# Altium PCB LED.PcbDoc
Units mil, origin at the board's own origin, x right, y up, seen from the top; angles counter-clockwise.
Board outline 4840 x 1895 mil, 2 copper layers (Top Layer, Bottom Layer); 15 components, 15 nets, 36 pads, 0 vias.
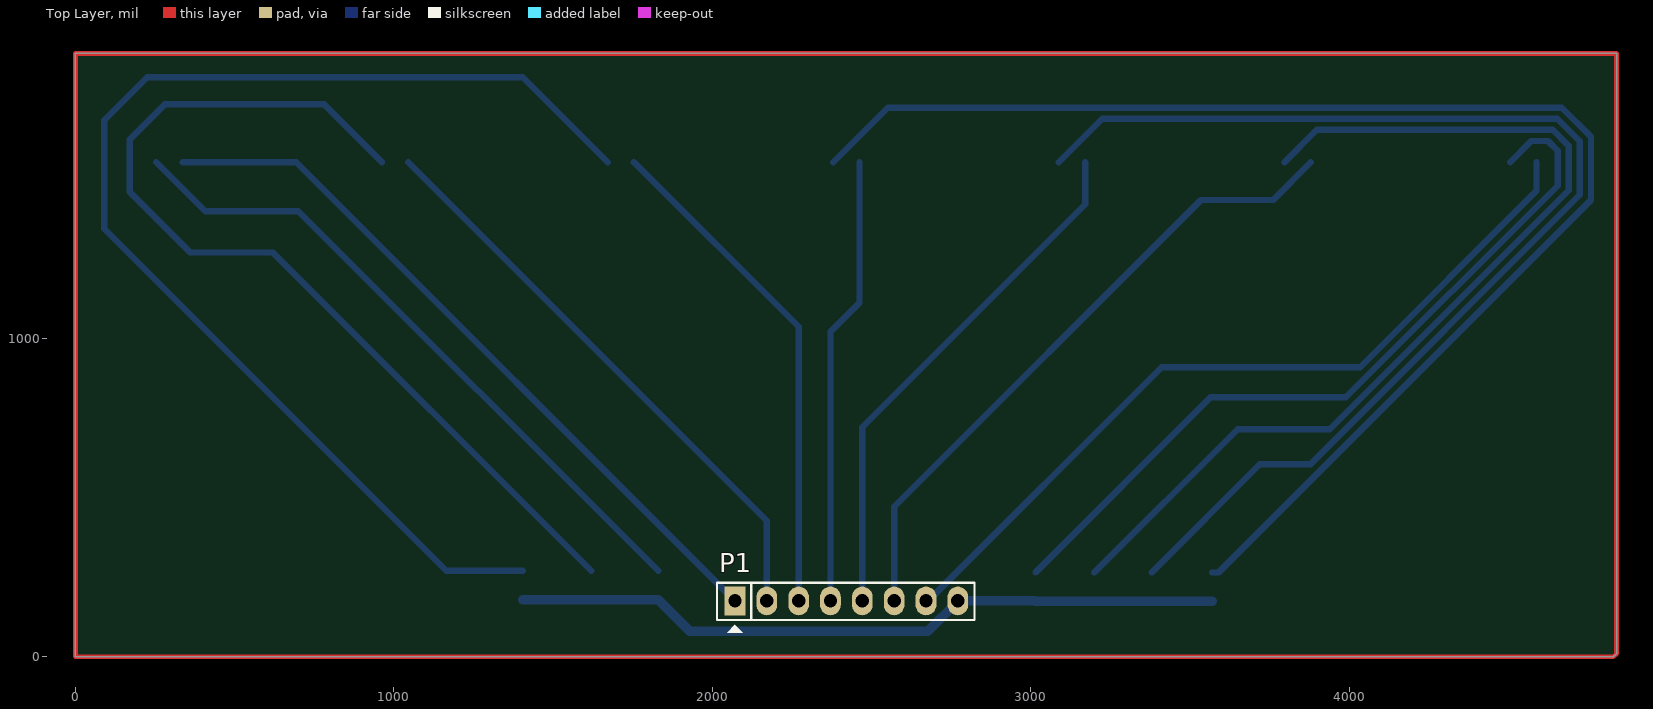
[diagram p0: Top Layer view]
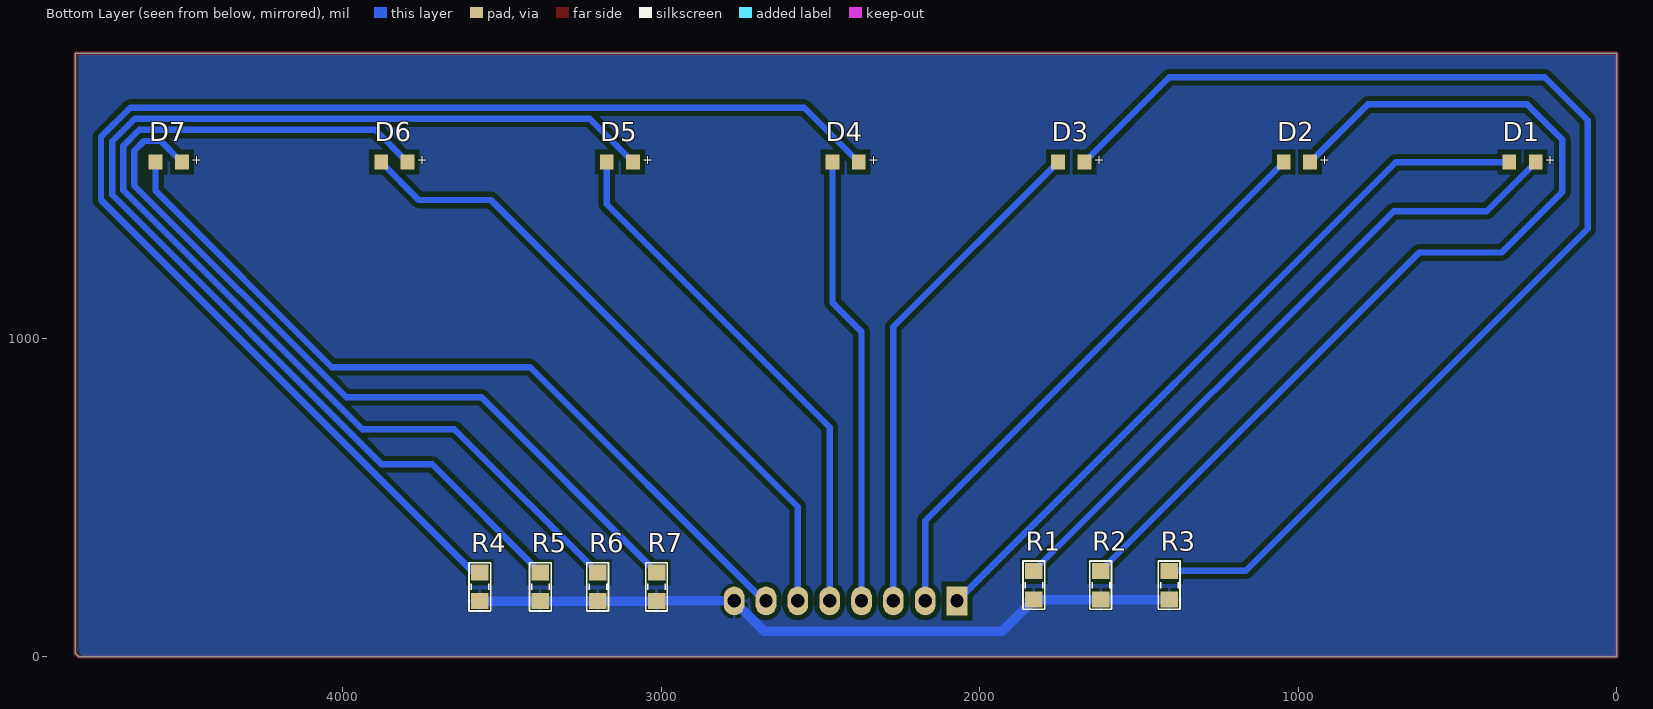
[diagram p1: Bottom Layer view, seen from below]
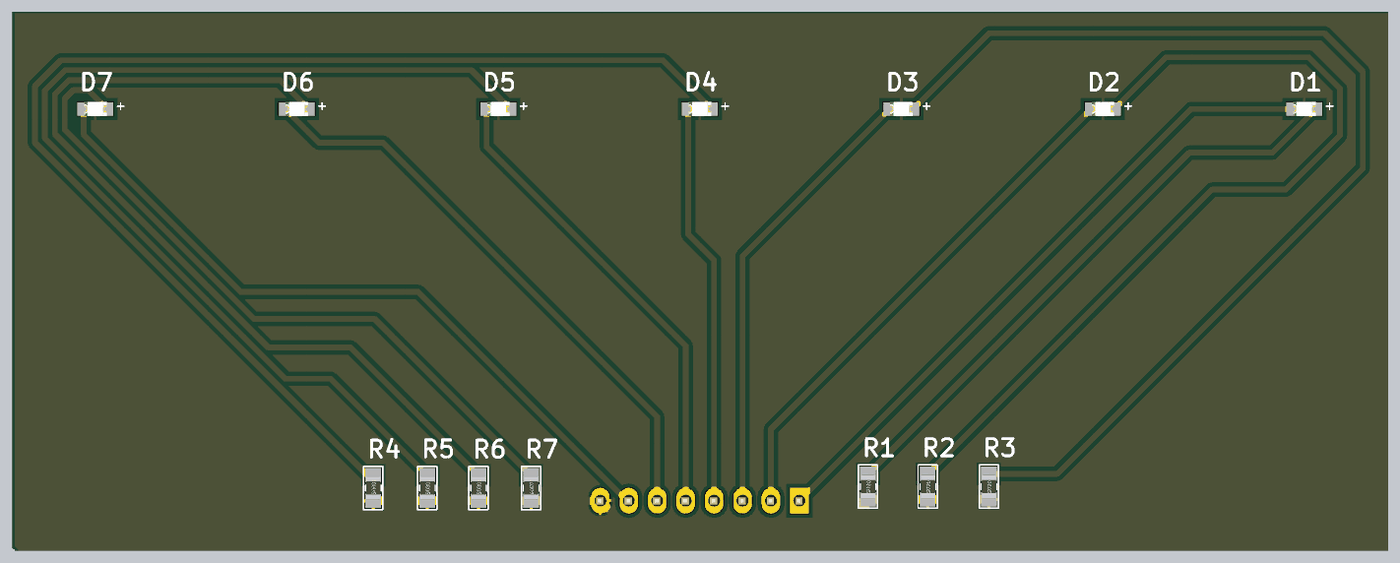
[diagram p2: 3D render of the assembled board from below, using the file's embedded part models]

## Layer stack, top to bottom
Top Solder: solder mask 0.4, Solder Resist, Dk 3.5
Top Layer: signal copper 1.4
Dielectric 1: dielectric 12.6, FR-4, Dk 4.8
Bottom Layer: signal copper 1.4
Bottom Solder: solder mask 0.4, Solder Resist, Dk 3.5

## Board outline
0,0 4830,0 4840,10 4840,1895 0,1895

## Design rules (kind name [scope] priority, off if disabled: settings)
Clearance [All] p1: gap=15 ignorepadtopadclearanceinfootprint=FALSE
PolygonConnect [All] p1: connectstyle=Relief reliefconductorwidth=10 reliefentries=4 polygonreliefangle="90 Angle" airgapwidth=10
RoutingVias [All] p1: holewidth=28 width=50 viastyle="Through Hole" minholewidth=28 minwidth=50 maxholewidth=28 maxwidth=50
SolderMaskExpansion [All] p1: expansion=4
Width [All] p1: maxlimit=30 minlimit=15 preferedwidth=20 minimp=50.000000 maximp=50.000000 favimp=50.000000
30 further rules are at their usual default settings.

## Components (designator, comment, footprint, x,y, rotation, side; value= is the part's Value field where it differs from the comment)
D1 "Red, 2V" WL-SMCW_0805 295.28,1553.54 r180 bottom
D2 "Red, 2V" WL-SMCW_0805 1003.94,1553.54 r180 bottom
D3 "Red, 2V" WL-SMCW_0805 1712.6,1553.54 r180 bottom
D4 "Red, 2V" WL-SMCW_0805 2421.26,1553.54 r180 bottom
D5 "Red, 2V" WL-SMCW_0805 3129.92,1553.54 r180 bottom
D6 "Red, 2V" WL-SMCW_0805 3838.58,1553.54 r180 bottom
D7 "Red, 2V" WL-SMCW_0805 4547.24,1553.54 r180 bottom
P1 "Header 8" JP8 2071.26,175.59 r0 top
R1 "Res-1K-0805" RES-SM-0805 1830,270 r270 bottom value=1K
R2 "Res-1K-0805" RES-SM-0805 1620,270 r270 bottom value=1K
R3 "Res-1K-0805" RES-SM-0805 1405,270 r270 bottom value=1K
R4 "Res-1K-0805" RES-SM-0805 3570,265 r270 bottom value=1K
R5 "Res-1K-0805" RES-SM-0805 3380,265 r270 bottom value=1K
R6 "Res-1K-0805" RES-SM-0805 3200,265 r270 bottom value=1K
R7 "Res-1K-0805" RES-SM-0805 3015,265 r270 bottom value=1K

## Footprints (in the part's own frame and the unit in brackets; to place one, negate y for a bottom-side part, rotate by r counter-clockwise, add the part's x,y. Pads: shape width x height; smd on the part's side, far side on the other; paste and mask are expansions set on the pad)
JP8 [mil] "JP8"
  rect 65x90 hole 42: 1(0,0)
  oval 65x90 hole 42: 2(100,0) 3(200,0) 4(300,0) 5(400,0) 6(500,0) 7(600,0) 8(700,0)
  silkscreen extent -56,-100 752,57, body extent -48,-50 748,48, height 323
RES-SM-0805 [mil]
  rect 50x55 smd: 1(0,0) 2(90,0)
  silkscreen extent -31,-34 121,34, body extent -5,-24 95,25, height 20
WL-SMCW_0805 [mm] "SMD Mono-color Chip LED, body 2.0x1.25mm"
  rect 1.1x1.2 smd: 1(-1.05,0) 2(1.05,0)
  body extent -1,-0.63 1,0.62, height 0.7

## Part data
D1 D2 D3 D4 D5 D6 D7: library part 150080RS75000, "WL-SMCW SMT Mono-color Chip LED Waterclear, size 0805, Red, 2V, 140deg", Emitting Color=Red, Forward Voltage typ.=2V, Operating Temperature="-40 to +85degC", Chip Technology=AlInGaP, ComponentLink1Description=Manufacturer, ComponentLink1URL=http://www.we-online.de, ComponentLink2Description=Datasheet, ComponentLink2URL=https://www.we-online.com/catalog/datasheet/150080RS75000.pdf, Dominant Wavelength typ.=625nm, Luminous Intensity typ.=150mcd, Mounting Technology=SMT, Packaging="Tape and Reel", Part Number=150080RS75000, Peak Wavelength typ.=630nm, Published Date="December 2019", Publisher="Wurth Elektronik", Size=0805, Viewing Angle=140deg
P1: "Header, 8-Pin", LatestRevisionDate=17-Jul-2002, LatestRevisionNote="Re-released for DXP Platform.", Publisher="Altium Limited"
R1 R2 R3 R4 R5 R6 R7: "RES 1K OHM 1% 1/4W 0805", Manufacturer="Stackpole Electronics Inc", Manufacturer Part Number=RNCP0805FTD1K00, Supplier 1 Part Number=RNCP0805FTD1K00CT-ND, Local Supplier=thegioiic, Local Supplier Link=https://thegioiic.com/products/dien-tro-1k-ohm-0805-5, Supplier 1=Digikey, Supplier 1 Link=https://www.digikey.com/product-detail/en/stackpole-electronics-inc/RNCP0805FTD1K00/RNCP0805FTD1K00CT-ND/2240568

## Nets (pads, with @x,y where several pads share a name; then routed paths per layer and width w, separated by ;. In a path a pad name is that pad's centre, name@x,y a point inside that pad or via, vN(x,y) a via of type N, cw(c..) or ccw(c..) an arc to the next point about the centre after c; other vN are vias at no path point)
3V3: P1.8 R1.2 R2.2 R3.2 R4.2 R5.2 R6.2 R7.2 | length 2246.8
  Bottom Layer w30: R3.2 R2.2 R1.2 1930,80 2676.56,80 2771.26,174.7 P1.8 3014.41,175.59 R7.2 R6.2 R5.2 R4.2
LED_A: D6.1 P1.6 | length 2047.6
  Bottom Layer w20: P1.6 2571.26,471.26 3535,1435 ; 3540,1435 3761.38,1435 D6.1
LED_B: D7.1 P1.7 | length 2540.8
  Bottom Layer w20: P1.7 2677.44,175.59 3411.85,910 4035,910 4588.58,1463.58 D7.1
LED_C: D1.1 P1.1 | length 2305.4
  Bottom Layer w20: D1.1 693.31,1553.54 P1.1
LED_D: D2.1 P1.2 | length 1844.4
  Bottom Layer w20: D2.1 2171.26,427.56 P1.2
LED_E: D3.1 P1.3 | length 1592.2
  Bottom Layer w20: D3.1 2271.26,1036.22 P1.3
LED_F: D4.1 P1.4 | length 1415.8
  Bottom Layer w20: P1.4 2371.26,1021.26 2462.6,1112.6 D4.1
LED_G: D5.1 P1.5 | length 1667.9
  Bottom Layer w20: P1.5 2471.26,721.26 3171.26,1421.26 D5.1
NetD1_2: D1.2 R1.1 | length 2107.7
  Bottom Layer w20: D1.2 407.48,1400 700,1400 R1.1
NetD2_2: D2.2 R2.1 | length 3021.2
  Bottom Layer w20: D2.2 781.14,1735 280,1735 170,1625 170,1460 360,1270 620,1270 R2.1
NetD3_2: D3.2 R3.1 | length 3847.8
  Bottom Layer w20: R3.1 1165,270 90,1345 90,1685 225,1820 1404.8,1820 D3.2
NetD4_2: D4.2 R4.1 | length 4362.1
  Bottom Layer w20: D4.2 2551.38,1725 4668.49,1725 4760,1633.49 4760,1435 3590,265 R4.1
NetD5_2: D5.2 R5.1 | length 3726.6
  Bottom Layer w20: D5.2 3225.04,1690 4653.99,1690 4725,1618.99 4725,1451.01 3878.99,605 3720,605 R5.1
NetD6_2: D6.2 R6.1 | length 3082
  Bottom Layer w20: R6.1 3650,715 3939.5,715 4690,1465.5 4690,1604.5 4639.5,1655 3898.7,1655 D6.2
NetD7_2: D7.2 R7.1 | length 2442.3
  Bottom Layer w20: R7.1 3565,815 3990,815 4655,1480 4655,1590 4625,1620 4572.36,1620 D7.2
copper on no net: | length 13464.1
  Top Layer w15: 0,0 0,1895 4840,1895 4840,10 4830,0 0,0

## Polygon pours and split planes (outlines as drawn)
3V3 on Bottom Layer "GND_L02_P-001" (solid, remove dead copper, pour order 2): 0,1890 4830,1890 4830,15 4815,0 0,0

## Other copper
Bottom Layer:
  region net 3V3: 2400,1720

## Text inside footprints (layer, text, board x,y; h text height)
D1: Bottom Overlay "+" at 194.88,1541.73 h30 r270
D2: Bottom Overlay "+" at 903.54,1541.73 h30 r270
D3: Bottom Overlay "+" at 1612.2,1541.73 h30 r270
D4: Bottom Overlay "+" at 2320.87,1541.73 h30 r270
D5: Bottom Overlay "+" at 3029.53,1541.73 h30 r270
D6: Bottom Overlay "+" at 3738.19,1541.73 h30 r270
D7: Bottom Overlay "+" at 4446.85,1541.73 h30 r270